# Altium PCB 56PCB -1.pcbdoc
Units mm, origin at the board's own origin, x right, y up, seen from the top; angles counter-clockwise.
Board outline 72.11 x 47.44 mm, 2 copper layers (Top Layer, Bottom Layer); 76 components, 155 nets, 310 pads, 138 vias.
Unrouted connection lines stored in the file: 101.
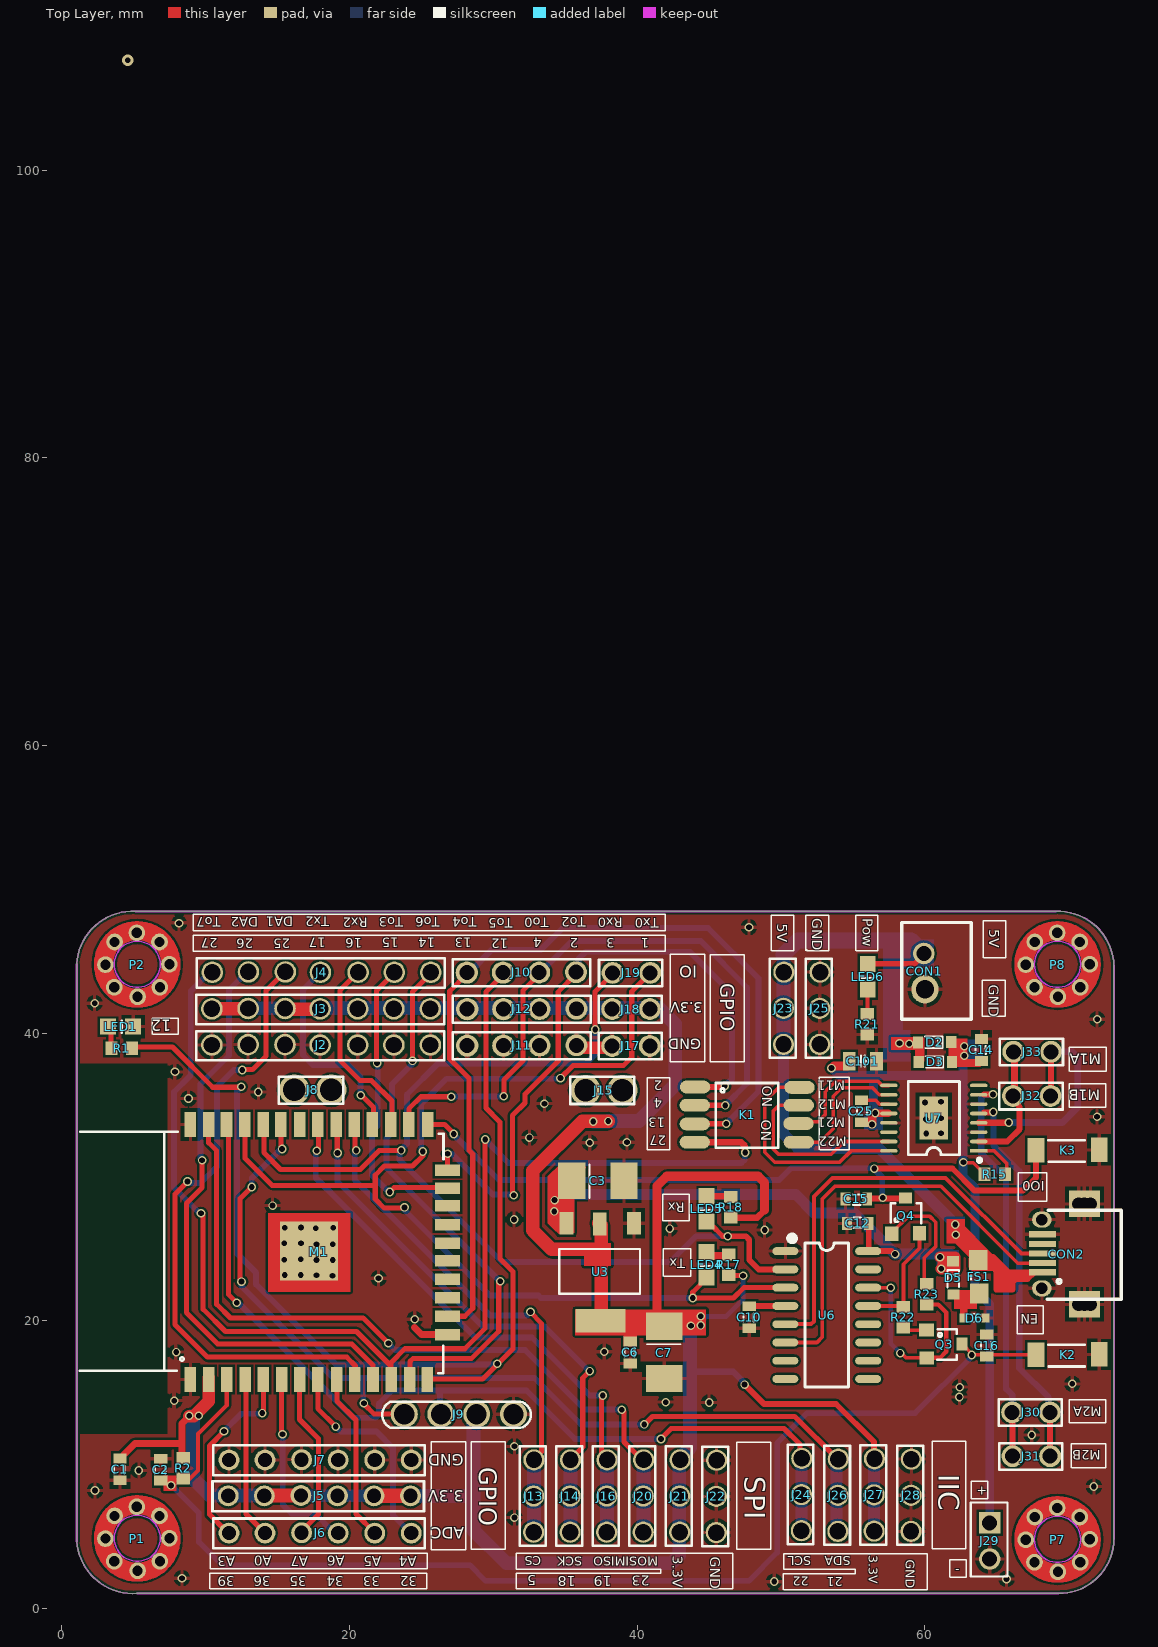
[diagram p0: Top Layer view]
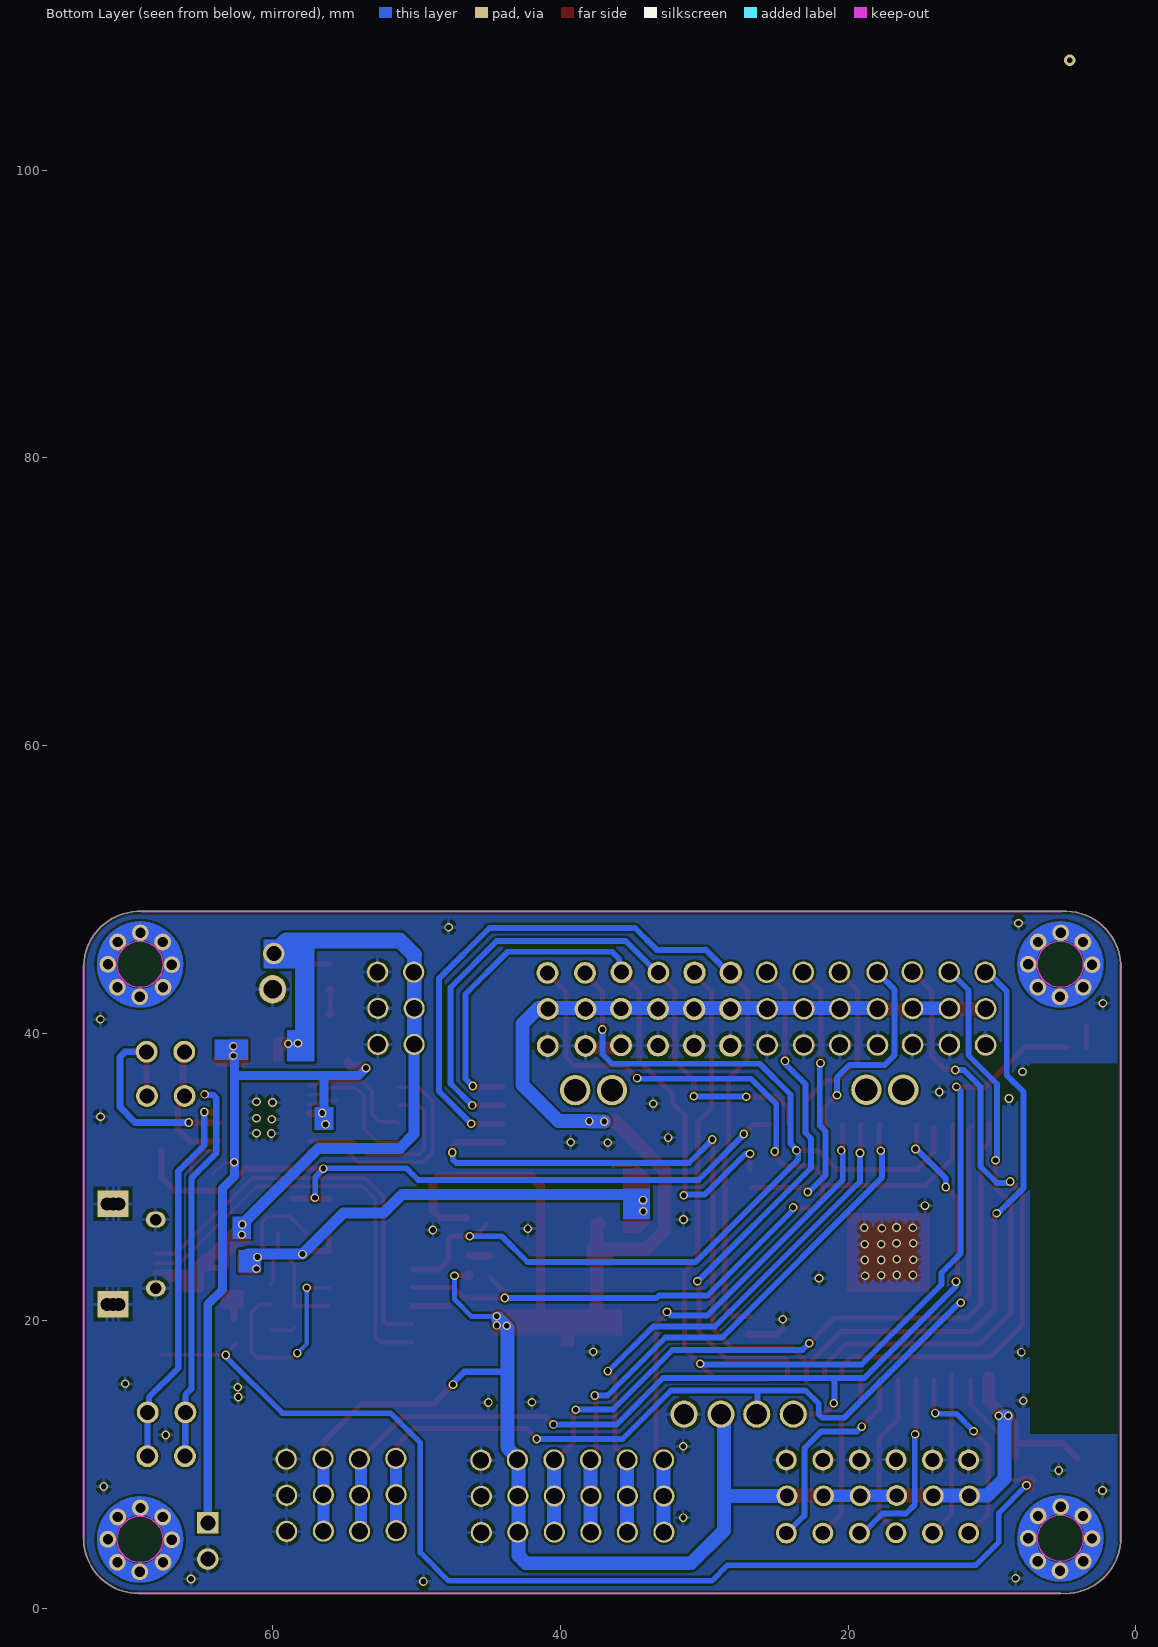
[diagram p1: Bottom Layer view, seen from below]

## Layer stack, top to bottom
Top Solder: solder mask 0.0102, Solder Resist, Dk 3.5
Top Layer: signal copper 0.0356
Dielectric 1: dielectric 0.32, FR-4, Dk 4.8
Bottom Layer: signal copper 0.0356
Bottom Solder: solder mask 0.0102, Solder Resist, Dk 3.5

## Board outline
1.043,4.671 1.043,44.803 cw(c4.915,44.588) 5.129,48.46 69.112,48.46 cw(c69.251,44.561) 73.15,44.701 73.15,4.823 cw(c69.328,4.861) 69.289,1.038 5.231,1.038 cw(c4.953,4.948)

## Design rules (kind name [scope] priority, off if disabled: settings)
Clearance [All] p1: gap=0.152 ignorepadtopadclearanceinfootprint=FALSE
HoleToHoleClearance [All] p1: gap=0.203 allowstackedmicrovias=TRUE
PolygonConnect [All] p1: connectstyle=Relief reliefconductorwidth=0.254 reliefentries=4 polygonreliefangle="90 Angle" airgapwidth=0.254
RoutingVias [All] p1: holewidth=6 width=8 viastyle="Through Hole" minholewidth=0.3 minwidth=0.6 maxholewidth=0.711 maxwidth=1.27
SilkToSilkClearance [All] p1: silktosilkclearance=0.152
SolderMaskExpansion [All] p1: expansion=0.102
Width [All] p1: maxlimit=5 minlimit=0.203 preferedwidth=0.254
28 further rules are at their usual default settings.

## Components (designator, comment, footprint, x,y, rotation, side; value= is the part's Value field where it differs from the comment)
C1 "104" COMPONENT_13 4.04,9.668 r90 top
C2 "104" COMPONENT_13 6.884,9.642 r90 top
C3 "100UF/10V" COMPONENT_17 37.263,29.734 r180 top
C6 "104" COMPONENT_13 39.523,17.796 r90 top
C7 "100UF/10V" COMPONENT_17 41.886,17.796 r90 top
C10 "104" COMPONENT_13 47.801,20.241 r90 top
C12 "104" COMPONENT_13 55.345,26.769 r0 top
C14 "104" COMPONENT_13 63.933,38.827 r90 top
C15 "104" COMPONENT_13 55.243,28.47 r180 top
C16 "104" COMPONENT_13 64.314,18.278 r90 top
C25 "10nf" COMPONENT_13 55.599,34.566 r270 top
C101 "10UF" "C 0805_L" 55.7,38.046 r180 top
CON1 "XH2.54MM*2P直针插座" COMPONENT_24 59.97,44.288 r90 top
CON2 "安卓尾插牛角5针USB插座" COMPONENT_25 69.724,24.628 r90 top
D2 "S4" COMPONENT_21 60.682,39.36 r0 top
D3 "S4" COMPONENT_21 60.732,37.989 r0 top
D5 "S4" COMPONENT_21 61.977,22.977 r90 top
D6 "NC" COMPONENT_22 63.45,20.183 r0 top
FS1 "FS" COMPONENT_23 63.755,23.054 r90 top
J2 "2.54排针13P黑色" COMPONENT_4 18.035,39.183 r90 top
J3 "2.54排针13P红色" COMPONENT_4 18.035,41.697 r90 top
J4 "2.54排针13P黄色" COMPONENT_4 18.06,44.237 r90 top
J5 "2.54排针6P红色" COMPONENT_1 17.908,7.839 r90 top
J6 "2.54排针6P蓝色" COMPONENT_1 17.959,5.248 r90 top
J7 "2.54排针6P黑色" COMPONENT_1 17.959,10.328 r90 top
J8 "2P圆孔排母DS18B20" COMPONENT_5 17.451,36.058 r90 top
J9 "4P圆孔排母DS18B20" COMPONENT_2 27.611,13.503 r90 top
J10 "NC" COMPONENT_6 31.954,44.212 r90 top
J11 "NC" COMPONENT_6 31.98,39.132 r90 top
J12 "NC" COMPONENT_6 31.98,41.672 r90 top
J13 "2.54排针3P白色" COMPONENT_3 32.818,7.814 r90 top
J14 "2.54排针3P绿色" COMPONENT_3 35.358,7.814 r90 top
J15 "2P圆孔排母DS18B20" COMPONENT_5 37.695,36.033 r90 top
J16 "2.54排针3P蓝色" COMPONENT_3 37.898,7.814 r90 top
J17 "NC" COMPONENT_7 39.574,39.106 r90 top
J18 "NC" COMPONENT_7 39.574,41.672 r90 top
J19 "NC" COMPONENT_7 39.6,44.186 r90 top
J20 "2.54排针3P黄色" COMPONENT_3 40.438,7.814 r90 top
J21 "2.54排针3P红色" COMPONENT_3 42.978,7.814 r90 top
J22 "2.54排针3P黑色" COMPONENT_3 45.518,7.788 r90 top
J23 "2.54排针3P红色" COMPONENT_3 50.191,41.723 r90 top
J24 "2.54排针3P蓝色" COMPONENT_3 51.436,7.915 r90 top
J25 "2.54排针3P黑色" COMPONENT_3 52.706,41.723 r90 top
J26 "2.54排针3P黄色" COMPONENT_3 53.976,7.864 r90 top
J27 "2.54排针3P红色" COMPONENT_3 56.491,7.89 r90 top
J28 "2.54排针3P黑色" COMPONENT_3 59.056,7.864 r90 top
J29 "NC" COMPONENT_8 64.517,4.689 r90 top
J30 "2.54排针2P蓝色" COMPONENT_7 67.387,13.63 r90 top
J31 "2.54排针2P黄色" COMPONENT_7 67.413,10.582 r90 top
J32 "2.54排针2P黄色" COMPONENT_7 67.438,35.627 r90 top
J33 "2.54排针2P蓝色" COMPONENT_7 67.463,38.7 r90 top
K1 "贴片拨码开关（4位，1.25mm脚间距）" COMPONENT_18 47.651,34.331 r90 top
K2 "3*4*2MM按键按钮 2脚" COMPONENT_19 69.927,17.643 r90 top
K3 "3*4*2MM按键按钮 2脚" COMPONENT_19 69.927,31.867 r90 top
LED1 "LED蓝" COMPONENT_11 4.09,40.453 r90 top
LED4 "LED蓝" COMPONENT_11 44.832,23.892 r0 top
LED5 "LED蓝" COMPONENT_11 44.832,27.778 r0 top
LED6 "LED蓝" COMPONENT_11 56.032,43.917 r0 top
M1 "ESP32-WROOM-32E（WIFI&蓝牙模块）" COMPONENT_9 18.111,24.781 r90 top
P1 "NC" COMPONENT_26 5.259,4.842 r90 top
P2 "NC" COMPONENT_26 5.259,44.745 r90 top
P7 "NC" COMPONENT_26 69.241,4.766 r90 top
P8 "NC" COMPONENT_26 69.241,44.745 r90 top
Q3 "Y1" COMPONENT_20 61.291,18.38 r90 top
Q4 "Y1" COMPONENT_20 58.672,27.226 r180 top
R1 "510R" COMPONENT_10 4.167,38.929 r90 top
R2 "100K" COMPONENT_10 8.459,9.744 r180 top
R15 "47K" COMPONENT_10 64.87,30.198 r90 top
R17 "510R" COMPONENT_10 46.356,23.892 r180 top
R18 "510R" COMPONENT_10 46.508,27.88 r180 top
R21 "1K" COMPONENT_10 56.005,40.612 r180 top
R22 "10K" COMPONENT_10 58.52,20.241 r180 top
R23 "10K" COMPONENT_10 60.145,21.841 r180 top
U3 "AMS1117-3.3V" COMPONENT_14 37.441,23.384 r90 top
U6 "CH340C" SOP16_N 53.186,20.393 r0 top
U7 "DRV8833" TSSOP16_L 60.628,34.084 r180 top

## Footprints (in the part's own frame and the unit in brackets; to place one, negate y for a bottom-side part, rotate by r counter-clockwise, add the part's x,y. Pads: shape width x height; smd on the part's side, far side on the other; paste and mask are expansions set on the pad)
"C 0805_L" [mil] "无极性贴片电容"
  rect 35x50 smd: 1(-37.4,0) 2(37.4,0)
  silkscreen extent -10,-15 10,15, body extent -39,-24 39,24, height 20
COMPONENT_1 [mil]
  round 57.11 hole 39: 1(-0.5,-249.5) 2(-0.5,-149.5) 3(-0.5,-49.5) 4(0.5,50.5) 5(-0.5,150.5) 6(-0.5,249.5)
  silkscreen extent -43,-286 40,292
COMPONENT_2 [mm]
  round 1.886 hole 1.4: 1(0,3.797) 2(0,1.257) 3(0,-1.232) 4(0,-3.797)
  silkscreen extent -0.94,-5 0.86,5.33
COMPONENT_3 [mil]
  round 58 hole 45: 1(-99,0.5) 2(0,0.5) 3(99,-0.5)
  silkscreen extent -136,-33 136,39
COMPONENT_4 [mil]
  round 59 hole 45: 1(-0.5,299) 2(0.5,200) 3(0.5,99) 4(-0.5,3) 5(-0.5,-100) 6(-0.5,-199) 7(-0.5,-299)
  silkscreen extent -43,-337 38,342
COMPONENT_5 [mil]
  round 83 hole 61: 1(0,50.5) 2(0,-50.5)
  silkscreen extent -38,-84 36,92
COMPONENT_6 [mil]
  round 61 hole 41: 1(-0.25,149.25) 2(-0.25,50.25)
  round 60 hole 41: 3(-0.25,-48.75) 4(0.75,-149.75)
  silkscreen extent -37,-189 37,188
COMPONENT_7 [mil]
  round 60 hole 41: 1(0,51.5) 2(0,-51.5)
  silkscreen extent -37,-84 36,88
COMPONENT_8 [mil]
  rect 59x59 hole 41: 1(49.5,0)
  round 59 hole 41: 2(-49.5,0)
  silkscreen extent -98,-49 106,52
COMPONENT_9 [mil]
  rect 68x31.5 smd: 1(-349,361.13) 2(-349,311.13) 3(-349,261.13) 4(-349,211.13) 5(-349,161.13) 6(-349,111.13) 7(-349,62.13) 8(-349,12.13) 9(-349,-39.87) 10(-349,-88.87) 11(-349,-138.87) 12(-349,-188.87) 13(-349,-238.87) 14(-349,-287.87) 25(349,-288.87) 26(349,-236.87) 27(349,-187.87) 28(349,-136.87) 29(349,-87.87) 30(349,-37.87) 31(349,12.13) 32(349,62.13) 33(349,113.13) 34(349,161.13) 35(349,212.13) 36(349,262.13) 37(349,310.13) 38(349,361.13)
  rect 31.5x68 smd: 15(-226,-342.87) 16(-176,-342.87) 17(-125,-342.87) 18(-74,-342.87) 19(-24,-342.87) 20(24,-342.87) 21(74,-342.87) 22(126,-342.87) 23(174,-342.87) 24(224,-342.87)
  rect 161x159 smd: 39(3,36.13)
  silkscreen extent -332,-332 329,664
COMPONENT_10 [mil]
  rect 37x33 smd: 1(0,28) 2(0,-28)
COMPONENT_11 [mil]
  rect 43x44 smd: 1(0,34.5) 2(0,-34.5)
  silkscreen extent -18,-3 16,-3
COMPONENT_13 [mil]
  rect 27x36 smd: 1(30,0) 2(-30,0)
  silkscreen extent -11,-12 10,16
COMPONENT_14 [mil]
  rect 62x38 smd: 1(133.75,-92.5) 2(131.75,1.5) 3(133.75,92.5)
  rect 63x138 smd: 4(-133.25,-0.5)
  silkscreen extent -59,-108 63,112
COMPONENT_17 [mil]
  rect 74.84x101 smd: 1(71.25,0)
  rect 73.84x101 smd: 2(-71.75,0)
  silkscreen extent 22,-45 22,48
COMPONENT_18 [mil]
  oval 34.84x83 smd: 1(75.5,142.5) 2(25.5,143.5) 3(-25.5,143.5) 4(-75.5,143.5) 5(-75.5,-141.5) 6(-24.5,-140.5) 7(25.5,-141.5) 8(74.5,-143.5)
  silkscreen extent -91,-86 87,86
COMPONENT_19 [mil]
  rect 66.84x46 smd: 1(-0.5,86.5) 2(0.5,-86.5)
  silkscreen extent -32,-48 27,52
COMPONENT_20 [mil]
  rect 35.84x40 smd: 1(38,46) 2(-38,45)
  rect 35.84x30 smd: 3(0,-51)
  silkscreen extent -43,-37 41,17
COMPONENT_21 [mil]
  rect 27.84x33 smd: 1(-45.5,-0.5) 2(45.5,0.5)
  silkscreen extent -26,-16 22,16
COMPONENT_22 [mil]
  rect 23.84x24 smd: 1(-29,0) 2(29,0)
  silkscreen extent -9,-9 10,11
COMPONENT_23 [mil]
  rect 54.84x51 smd: 3(46,1) 4(-46,-1)
  silkscreen extent -8,-19 5,21
COMPONENT_24 [mil]
  round 59 hole 41: 1(49,1.5)
  oval 77.84x74 hole 50: 2(-49,-1.5)
  silkscreen extent -131,-128 134,62
COMPONENT_25 [mil]
  rect 16.84x74 smd: 1(-49.5,60.25) 2(-24.5,60.25) 3(1.5,60.25) 4(27.5,60.25) 5(54.5,60.25)
  oval 43.84x54 hole 32: 6(-93.5,62.25) 7(94.5,62.25)
  rect 72.84x53 hole 36: 8(137.5,-38.75) 9(137.5,-70.75) 10(137.5,-53.75) 11(-137.5,-38.75) 12(-137.5,-70.75) 13(-137.5,-54.75)
  silkscreen extent -124,-155 121,47
COMPONENT_26 [mil]
  round 45.84 hole 28: 1(-61.5,63.5) 2(0.5,87.5) 3(62.5,62.5) 4(87.5,1.5) 5(62.5,-60.5) 6(1.5,-87.5) 7(-61.5,-61.5) 8(-87.5,-0.5)
  Top Layer circle w51.94: c1.08,0.5 r92.42
  Bottom Layer circle w51.94: c1.08,0.5 r92.42
  Keep-Out Layer circle w3.94: c1.37,0.5 r63.13
SOP16_N [mm] "10.3*6.2*1.8mm（长宽高）"
  oval 1.8x0.55 smd: 1(-2.877,4.445) 2(-2.877,3.175) 3(-2.877,1.905) 4(-2.877,0.635) 5(-2.877,-0.635) 6(-2.877,-1.905) 7(-2.877,-3.175) 8(-2.877,-4.445) 9(2.877,-4.445) 10(2.877,-3.175) 11(2.877,-1.905) 12(2.877,-0.635) 13(2.877,0.635) 14(2.877,1.905) 15(2.877,3.175) 16(2.877,4.445)
  silkscreen extent -2.57,-5 1.52,5.49, body extent -3,-5 3,5, height 1.9
TSSOP16_L [mm] "5*6.4*1mm（长宽高）"
  rect 2x3 smd: 0(0,0)
  rect 1.2x0.25 smd: 1(-3.125,2.275)
  oval 1.2x0.25 smd: 2(-3.125,1.625) 3(-3.125,0.975) 4(-3.125,0.325) 5(-3.125,-0.325) 6(-3.125,-0.975) 7(-3.125,-1.625) 8(-3.125,-2.275) 9(3.125,-2.275) 10(3.125,-1.625) 11(3.125,-0.975) 12(3.125,-0.325) 13(3.125,0.325) 14(3.125,0.975) 15(3.125,1.625) 16(3.125,2.275)
  silkscreen extent -3.3,-2.54 1.78,3.05, body extent -3.2,-2.5 3.2,2.5, height 1.03

## Via types
v1: diameter 0.6, hole 0.4, Top Layer to Bottom Layer, tented both sides, 137 vias
v2: diameter 0.8, hole 0.4, Top Layer to Bottom Layer, 1 vias

## Nets (pads, with @x,y where several pads share a name; then routed paths per layer and width w, separated by ;. In a path a pad name is that pad's centre, name@x,y a point inside that pad or via, vN(x,y) a via of type N, cw(c..) or ccw(c..) an arc to the next point about the centre after c; other vN are vias at no path point)
3.3V: C1.1 C6.1 C7.1 J3.1 J3.2 J3.3 J3.4 J3.5 J3.6 J3.7 J5.1 J5.2 J5.3 J5.4 J5.5 J5.6 J9.3 J12.1 J12.2 J12.3 J12.4 J18.1 J18.2 J21.1 J21.2 J21.3 J27.1 J27.2 J27.3 M1.2 R2.2 R17.1 R18.1 U3.2 U3.4 | length 193
  Top Layer w0.345: R17.1@46.4,23.136 v1(47.369,23.136)
  Top Layer w0.405: 52.932,14.214 53.83,14.214 56.465,11.579 56.465,10.379 J27.3@56.516,10.328
  Top Layer w0.43: v1(47.474,15.561) 48.82,14.214 52.932,14.214
  Top Layer w0.456: R18.1 R18.1@46.661,27.168 ; R18.1@46.661,27.092 R18.1@46.661,27.168 ; 48.868,27.686 48.35,27.168 R18.1@46.661,27.168
  Top Layer w0.481: C1.1 5.081,11.471 8.281,11.471 ; R2.2@8.358,10.531 8.358,12.843 v1@8.866,13.351
  Top Layer w0.633: C7.1 41.375,20.116 41.375,29.359 42.061,30.045 48.42,30.045 48.868,29.597 48.868,27.686
  Top Layer w0.71: v1@44.324,20.336 v1@44.375,20.336 ; v1(44.426,20.31) v1@44.452,20.337 ; R17.1 R17.1@46.4,23.136
  Top Layer w0.862: v1@8.866,13.351 9.17,13.351 10.212,14.392 M1.2@10.212,16.043
  Top Layer w0.938: J3.1@10.415,41.697 J3.2@13.158,41.697 ; J3.3@15.673,41.672 J3.4@18.06,41.672 ; v1(36.955,33.855) 36.178,33.856 32.742,30.42 32.742,26.279 34.062,24.959 37.491,24.959 ; v1(36.955,33.855) 37.971,33.855 v1(37.997,33.881) ; U3.2@37.339,26.787 37.491,26.635 37.491,24.959 ; U3.4@37.491,20.183 37.491,24.959 ; 37.568,24.959 37.491,24.959
  Top Layer w0.989: J5.5@14.111,7.852 J5.4 ; J5.2 J5.1
  Bottom Layer w0.345: v1(44.426,20.31) 46.194,20.31 47.369,21.485 v1(47.369,23.136)
  Bottom Layer w0.43: 43.918,16.45 46.686,16.45 47.474,15.662 v1(47.474,15.561) v1@47.474,15.484
  Bottom Layer w0.837: J27.1 J27.2 J27.3@56.478,10.544
  Bottom Layer w0.862: J5.4@16.651,7.826 J5.3 J5.2
  Bottom Layer w0.964: v1@9.247,13.351 8.993,13.351 9.12,13.224 9.12,9.033 10.313,7.839 J5.5@14.2,7.839 ; J3.2@12.853,41.723 J3.3@15.52,41.723 ; J3.4@18.06,41.748 41.53,41.748 42.648,40.63 42.648,36.398 40.13,33.881 v1(37.997,33.881) 37.971,33.855 v1(36.955,33.855) ; J5.1 28.589,7.826 ; J9.3 28.627,13.287 28.627,5.426 30.913,3.14 42.394,3.14 42.927,3.673 42.927,10.404 43.689,11.166 43.689,19.498 v1@44.349,20.158
  other v1: 8.866,13.402 9.526,13.402 43.74,19.65 44.426,19.675
+5v: C3.1 C12.1 D5.2 U3.3 U6.16 | length 43.5
  Top Layer w0.202: U3.3@35.155,26.279 34.418,26.279 33.859,26.838 33.859,29.988 34.672,30.801 36.221,30.801 C3.1@36.348,30.674
  Top Layer w0.405: C12.1 56.107,24.882 U6.16 57.68,24.838 57.883,24.635 v1(57.936,24.635)
  Top Layer w0.786: v1(61.063,24.425) 62.104,24.425 62.104,23.612 v1(61.139,23.612) ; 61.266,23.993 61.748,23.993 D5.2@61.825,23.917
  Bottom Layer w0.76: 34.977,28.769 51.03,28.769 52.3,27.499 55.072,27.499 v1(57.936,24.635) 60.853,24.635 v1(61.063,24.425) ; v1@61.063,24.654 61.774,24.654
  other v1: 34.24,27.6 34.266,28.388
AOUT1: J32.1 J33.1 U7.2 | length 8.9
  Top Layer w0.405: U7.2 65.734,32.459 66.597,33.322 66.597,34.857 66.13,35.324 J32.1
  Top Layer w0.481: J32.1@66.143,35.55 66.244,35.652 66.244,38.611 J33.1
AOUT2: J32.2 J33.2 U7.4 | length 15.9
  Top Layer w0.43: U7.4 63.763,33.769 65.825,33.769 v1(65.835,33.779) ; J32.2@68.746,35.817 68.772,35.843 J33.2
  Bottom Layer w0.481: v1(65.835,33.779) 69.569,33.779 70.636,34.846 70.636,38.349 70.284,38.7 J33.2 ; J33.2@68.683,38.573 J33.2@68.683,38.7
BOUT1: J30.1 J31.1 U7.7 | length 30.4
  Top Layer w0.43: U7.7@64.138,35.722 64.73,35.722 v1(64.743,35.735) ; J30.1 66.092,13.618 66.092,10.595 J31.1
  Bottom Layer w0.43: v1(64.743,35.735) 64.71,35.702 64.15,35.702 63.93,35.483 63.93,31.645 65.657,29.918 65.657,15.262 66.079,14.841 J30.1 66.092,13.618 66.092,10.595 J31.1
BOUT2: J30.2 J31.2 U7.5 | length 29.3
  Top Layer w0.43: U7.5@64.138,34.483 64.736,34.483 v1(64.768,34.516) ; J30.2 68.708,13.618 68.708,10.595 J31.2
  Bottom Layer w0.43: v1(64.768,34.516) 64.768,32.204 66.572,30.401 66.572,16.71 68.609,14.673 68.609,13.717 68.708,13.618 68.708,10.595 J31.2
D+: CON2.3 U6.5 | length 29.4
  Top Layer w0.278: U6.5 52.094,19.758 52.297,19.961 52.297,28.651 53.582,29.937 61.448,29.937 66.718,24.667 CON2.3
D-: CON2.2 U6.6 | length 30.2
  Top Layer w0.254: U6.6 52.5,18.488 52.881,18.869 52.881,28.47 53.758,29.348 61.123,29.348 66.464,24.006 CON2.2
DTR: Q4.2 R22.2 U6.13 | length 8
  Top Layer w0.252: U6.13 R22.2@58.444,21.028 ; R22.2 58.52,23.924 59.637,25.041 Q4.2
GND: C1.2 C2.1 C3.2 C6.2 C7.2 C10.2 C12.2 C14.1 C15.1 C16.1 C101.1 CON1.2 CON2.5 CON2.6 CON2.7 CON2.8 CON2.9 CON2.10 CON2.11 CON2.12 CON2.13 D6.2 J2.1 J2.2 J2.3 J2.4 J2.5 J2.6 J2.7 J7.1 J7.2 J7.3 J7.4 J7.5 J7.6 J9.4 J11.1 J11.2 J11.3 J11.4 J17.1 J17.2 J22.1 J22.2 J22.3 J25.1 J25.2 J25.3 J28.1 J28.2 J28.3 J29.2 K2.2 K3.2 LED1.2 M1.1 M1.15 M1.38 M1.39 R21.1 U3.1 U6.1 U7.0 U7.3 U7.6 U7.13 | length 5.1
  Top Layer w0.481: 24.537,19.523 25.02,19.04 M1.15@26.95,19.04
  Top Layer w0.837: J11.4@35.84,38.979 J17.1@38.279,38.979
  other v1: 49.531,1.87 65.685,2.048 8.358,2.099 31.472,6.315 2.312,8.195 71.756,8.474 5.36,9.592 31.472,11.268 67.438,12.055 45.01,14.316 41.987,14.341 7.824,14.443 62.409,14.697 62.434,15.383 70.257,15.611 7.951,17.821 37.72,17.847 24.537,20.107 22.023,22.952 18.822,23.13 17.705,23.155 15.495,23.181 16.613,23.181 17.705,24.222 18.848,24.222 15.47,24.247 16.613,24.273 17.705,25.314 18.848,25.314 15.47,25.39 16.638,25.39 48.868,26.311 42.267,26.406 17.654,26.432 15.495,26.457 18.873,26.457 16.638,26.483 31.446,27.041 14.657,28.007 36.704,32.375 39.292,32.407 32.513,32.731 60.095,33.017 61.136,33.042 60.069,34.008 61.136,34.084 71.982,34.185 33.554,35.093 60.018,35.176 61.136,35.227 8.815,35.449 13.666,35.906 7.875,37.303 71.985,40.961 2.287,42.078 47.778,47.361 8.154,47.641
M11: K1.8 U7.16 | length 15.6
  Top Layer w0.254: K1.8 49.839,36.224 48.868,35.252 48.868,31.722 49.579,31.01 54.075,31.01 54.873,31.809 U7.16
M12: K1.7 U7.15 | length 13.1
  Top Layer w0.254: K1.7 49.865,34.979 49.477,34.592 49.477,31.925 49.833,31.569 53.491,31.569 54.38,32.459 U7.15
M21: K1.6 U7.9 | length 8.6
  Top Layer w0.254: K1.6 51.341,33.83 52.576,33.83 53.084,34.338 53.084,35.938 53.795,36.649 56.742,36.649 57.032,36.359 U7.9
M22: K1.5 U7.10 | length 9.3
  Top Layer w0.254: K1.5 52.709,32.414 53.643,33.347 53.643,35.608 54.227,36.192 56.361,36.192 56.844,35.709 U7.10
Net: 
NewNet1: P8.1 P8.2 P8.3 P8.4 P8.5 P8.6 P8.7 P8.8
NewNet2: P7.1 P7.2 P7.3 P7.4 P7.5 P7.6 P7.7 P7.8
NewNet3: P2.1 P2.2 P2.3 P2.4 P2.5 P2.6 P2.7 P2.8
NewNet4: P1.1 P1.2 P1.3 P1.4 P1.5 P1.6 P1.7 P1.8
NewNet15: J10.4 K1.1 M1.24 | length 45.8
  Top Layer w0.354: M1.24 v1@26.82,31.61 ; v1(31.421,28.718) 31.345,28.794 31.345,34.28 32.208,35.144 32.208,35.754 34.52,38.065 34.52,42.866 J10.4@35.79,44.136
  Top Layer w0.405: K1.1 45.976,36.249 46.046,36.319 v1(46.099,36.319)
  Bottom Layer w0.405: v1(26.823,31.613) 27.128,31.613 29.973,28.769 31.37,28.769 v1(31.421,28.718) ; J10.4@35.917,44.364 35.917,45.152 36.425,45.66 43.664,45.66 46.607,42.716 46.607,36.827 v1(46.099,36.319)
NewNet16: J10.3 K1.2 M1.26 | length 45.4
  Top Layer w0.354: M1.26 24.128,34.734 24.969,35.576 v1(27.077,35.576) ; v1(30.735,35.601) 30.735,36.744 32.056,38.065 32.056,42.942 33.326,44.212 J10.3@33.326,44.288
  Top Layer w0.405: K1.2 44.01,34.976 46.122,34.976 v1(46.125,34.973)
  Bottom Layer w0.405: v1@27.103,35.601 v1(30.735,35.601) ; J10.3@33.199,44.364 33.427,44.364 35.459,46.396 44.426,46.396 47.649,43.173 47.649,36.497 v1(46.125,34.973)
NewNet17: J10.2 M1.14 R1.2 | length 76.5
  Top Layer w0.354: R1.2@4.802,38.979 4.852,39.03 7.697,39.03 10.491,36.236 v1@12.599,36.236 ; M1.14@25.503,15.942 29.262,15.942 31.37,18.05 31.37,23.409 30.456,24.324 30.456,33.823 29.49,34.788 29.49,42.866 J10.2@30.811,44.186
  Bottom Layer w0.405: v1(12.472,36.262) 12.193,35.982 12.193,24.654 13.514,23.333 13.514,22.52 19.076,16.958 v1@30.176,16.958
  other v1: 30.278,17.008
NewNet18: J10.1 K1.3 M1.16 | length 62.6
  Top Layer w0.354: M1.16 28.017,20.31 28.576,20.869 28.576,31.588 28.322,31.842 28.322,36.846 26.976,38.192 26.976,42.916 J10.1@28.163,44.104
  Top Layer w0.405: K1.3 44.016,33.693 46.191,33.693 v1(46.201,33.703)
  Bottom Layer w0.405: 29.897,45.787 33.3,45.787 34.824,47.311 44.934,47.311 48.436,43.808 48.436,35.938 v1(46.201,33.703)
  Bottom Layer w0.43: J10.1 28.316,44.206 29.897,45.787
NewNet19: J4.7 M1.13 | length 37.6
  Top Layer w0.354: M1.13@24.207,16.094 24.207,17.161 24.41,17.364 28.474,17.364 30.379,19.269 30.379,22.647 v1(30.481,22.749) ; v1(24.385,38.065) 24.385,42.866 J4.7@25.655,44.136
  Bottom Layer w0.405: v1(24.385,38.065) 24.385,37.862 22.963,36.439 22.963,33.061 22.582,32.68 22.582,30.623 v1@30.456,22.749
NewNet20: J4.6 M1.23 | length 20.6
  Top Layer w0.354: v1(21.921,37.913) 21.896,37.938 21.896,42.967 23.039,44.11 J4.6@23.14,44.11 ; v1(22.81,28.946) 23.115,29.251 M1.23@26.747,29.251
  Bottom Layer w0.405: v1(21.921,37.913) 21.972,37.862 21.972,33.569 21.566,33.163 21.566,30.115 22.734,28.946 v1(22.81,28.946)
NewNet21: J4.5 M1.27 | length 13.1
  Top Layer w0.354: J4.5@20.575,44.212 19.33,42.967 19.33,38.116 20.753,36.693 21.54,36.693 22.963,35.271 22.963,33.725 M1.27
NewNet22: J4.4 M1.28 | length 14.9
  Top Layer w0.354: v1@20.778,35.728 21.667,34.839 21.667,33.696 M1.28@21.489,33.518
  Bottom Layer w0.405: J4.4@18.06,44.313 16.765,43.018 16.765,38.471 17.451,37.786 19.915,37.786 20.778,36.922 v1(20.778,35.677)
NewNet23: J4.3 M1.10 | length 43.8
  Top Layer w0.354: v1@8.739,29.658 7.875,28.794 7.875,19.726 10.136,17.466 19.813,17.466 20.423,16.856 M1.10@20.423,16.069 ; v1@12.472,37.455 13.26,37.455 14.2,38.395 14.2,42.942 J4.3@15.597,44.339
  Bottom Layer w0.405: v1(8.739,29.683) 8.84,29.581 9.653,29.581 10.796,30.724 10.796,36.262 11.964,37.43 v1(12.549,37.43)
NewNet24: J4.2 M1.11 | length 41.1
  Top Layer w0.354: v1(9.755,31.156) 9.755,29.251 8.662,28.159 8.662,20.564 10.847,18.38 20.169,18.38 21.642,16.907 M1.11@21.642,15.992
  Bottom Layer w0.405: v1(9.755,31.156) 9.653,31.258 9.653,36.465 11.634,38.446 11.634,42.993 J4.2@12.98,44.339
NewNet25: J4.1 K1.4 M1.12 | length 85.4
  Top Layer w0.354: v1(9.678,27.473) 9.831,27.321 9.831,20.793 11.38,19.244 20.499,19.244 22.886,16.856 ; M1.12@22.886,15.764 22.886,17.085 23.852,18.05 28.017,18.05 29.414,19.447 v1@29.414,32.604
  Top Layer w0.456: K1.4 47.226,32.414 47.494,32.145 47.494,31.724 v1(47.522,31.696)
  Bottom Layer w0.405: v1(9.678,27.473) 9.577,27.473 7.799,29.251 7.799,35.906 8.967,37.074 8.967,42.916 J4.1@10.275,44.225 ; v1@29.44,32.579 31.059,30.96 47.247,30.96 47.484,31.197 47.484,31.659 v1(47.522,31.696)
  other v1: 29.44,32.604
NewNet26: J9.1 J26.1 J26.2 J26.3 M1.33 | length 69.6
  Top Layer w0.354: v1(12.498,22.723) 12.396,22.825 12.396,28.489 v1(13.209,29.302) ; v1@15.238,32.023 M1.33 ; v1@21.007,14.214 21.718,13.503 J9.1 ; v1(40.489,12.792) 40.514,12.792 41.073,13.351 50.953,13.351 J26.3@53.925,10.379
  Bottom Layer w0.405: v1(12.498,22.723) 12.498,22.393 18.873,16.018 32.869,16.018 36.094,12.792 40.387,12.792 v1@40.489,12.69 ; v1(13.209,29.302) 13.209,29.912 ; 13.476,30.178 13.209,29.912 ; v1@15.292,32.02 15.292,31.994 13.209,29.912 ; 20.956,15.992 20.956,14.316 v1(21.007,14.265)
  Bottom Layer w0.837: J26.1@53.874,5.324 J26.3@53.874,10.265
  other v1: 15.317,31.944
NewNet27: J9.2 J24.1 J24.2 J24.3 M1.36 | length 67.2
  Top Layer w0.354: M1.36@11.406,33.544 11.583,33.366 11.583,21.834 v1(12.168,21.25) ; v1@41.708,11.852 42.368,12.513 50.217,12.513 51.334,11.395 J24.3@51.334,10.404
  Bottom Layer w0.405: v1(12.168,21.25) 12.269,21.25 20.27,13.249 21.82,13.249 22.048,13.478 22.048,14.24 22.963,15.154 28.22,15.154 ; J9.2@26.29,13.402 26.29,15.002 ; 27.001,15.154 32.31,15.154 35.688,11.776 v1(41.657,11.776)
  Bottom Layer w0.837: J24.1 J24.3@51.423,10.404
NewNet28: J20.1 J20.2 J20.3 M1.37 | length 53.2
  Top Layer w0.354: M1.37@10.212,33.747 10.212,32.375 10.771,31.817 10.771,21.149 11.736,20.183 20.956,20.183 v1(22.709,18.431) ; v1@38.888,13.884 39.092,13.681 39.092,11.573 40.336,10.328 J20.3
  Bottom Layer w0.405: v1(22.709,18.431) 23.166,17.974 32.208,17.974 36.348,13.833 v1@38.863,13.833
  Bottom Layer w0.964: J20.1@40.451,5.324 J20.3
  other v1: 38.939,13.808
NewNet29: J16.1 J16.2 J16.3 M1.31 | length 39.5
  Top Layer w0.354: v1(17.73,31.817) 17.857,31.944 17.857,33.591 M1.31 ; v1@37.517,14.697 37.517,10.735 J16.3@37.847,10.404
  Bottom Layer w0.405: v1@17.654,31.842 17.654,29.937 28.754,18.837 32.691,18.837 36.729,14.799 v1(37.618,14.799)
  Bottom Layer w0.964: J16.1@37.911,5.324 J16.3
NewNet30: J14.1 J14.2 J14.3 M1.30 | length 38.6
  Top Layer w0.329: J14.3 J14.3@35.371,10.366
  Top Layer w0.354: M1.30 19.153,33.566 v1@19.153,31.69 ; J14.3@35.371,10.366 36.221,11.217 36.221,16.018 v1(36.704,16.5)
  Bottom Layer w0.405: v1(19.178,31.664) 19.178,29.683 29.262,19.599 33.554,19.599 v1@36.653,16.5
  Bottom Layer w0.964: J14.1@35.371,5.337 J14.3
NewNet31: J13.1 J13.2 J13.3 M1.29 | length 36
  Top Layer w0.329: v1@32.589,20.59 33.351,19.828 33.351,10.849 J13.3
  Top Layer w0.354: M1.29 20.397,33.591 20.397,31.918 v1(20.473,31.842)
  Bottom Layer w0.405: v1(20.473,31.842) 20.372,31.74 20.372,29.785 29.795,20.361 32.335,20.361 v1(32.589,20.615)
  Bottom Layer w0.964: J13.1@32.831,5.324 J13.3
NewNet32: J6.6 M1.5 | length 13.4
  Top Layer w0.354: v1(11.279,12.309) 10.263,11.293 10.263,6.544 J6.6@11.456,5.35 ; v1(13.946,13.579) 14.019,13.652 M1.5
  Bottom Layer w0.405: v1(11.279,12.309) 11.279,12.335 12.472,13.529 13.895,13.529 v1(13.946,13.579)
NewNet33: J6.5 M1.4 | length 11.6
  Top Layer w0.354: M1.4@12.803,16.246 12.803,6.569 J6.5
NewNet34: J6.4 M1.7 | length 11.5
  Top Layer w0.354: M1.7 16.533,13.125 17.857,11.801 17.857,6.544 J6.4@16.74,5.426
NewNet35: J6.3 M1.6 | length 13.3
  Top Layer w0.354: v1@15.289,12.16 M1.6
  Bottom Layer w0.405: v1@15.368,12.182 15.368,7.208 15.981,6.594 17.603,6.594 18.848,5.35 J6.3@19.127,5.35
  other v1: 15.343,12.106
NewNet36: J6.2 M1.9 | length 11.8
  Top Layer w0.354: M1.9 19.124,14.421 20.448,13.097 20.448,6.569 21.756,5.261 J6.2
NewNet37: J6.1 M1.8 | length 14.8
  Top Layer w0.354: M1.8 17.803,13.887 v1(19.051,12.64)
  Bottom Layer w0.405: v1(19.051,12.64) 19.381,12.309 21.87,12.309 23.036,11.144 23.036,6.47 24.271,5.236 J6.1
NewNet38: 
NewNet39: 
NewNet40: 
NewNet41: 
NewNet42: 
NewNet43: 
NewNet44: 
NewNet45: 
NewNet46: 
NewNet47: 
NewNet48: 
NewNet49: 
NewNet50: 
NewNet51: 
NewNet52: 
NewNet53: 
NewNet54: 
NewNet55: 
NewNet56: 
NewNet57: 
NewNet58: 
NewNet59: 
NewNet60: 
NewNet61: 
NewNet62: 
NewNet63: 
NewNet64: 
NewNet65: 
NewNet66: 
NewNet67: 
NewNet68: 
NewNet69: 
NewNet70: 
NewNet71: 
NewNet72: 
NewNet73: 
NewNet74: 
NewNet75: 
NewNet76: 
NewNet77: 
NewNet78: 
NewNet79: 
NewNet80: 
NewNet81: 
NewNet82: 
NewNet83: 
NewNet84: 
NewNet85: 
NewNet86: 
NewNet87: 
NewNet88: 
NewNet89: 
NewNet90: 
NewNet91: 
NewNet92: 
NewNet93: 
NewNet94: 
NewNet95: 
NewNet96: 
NewNet97: 
NewNet100: D5.1 D6.1 FS1.4 | length 2.4
  Top Layer w0.532: D6.1 62.714,21.225 63.298,21.809 FS1.4@63.857,21.809
NewNet102: C15.2 K3.1 M1.25 Q4.3 | length 52.1
  Top Layer w0.354: M1.25 26.62,33.645 27.255,33.01 v1(27.255,32.985)
  Top Layer w0.405: C15.2 56.031,28.496 58.647,28.496 Q4.3 ; v1(56.488,30.579) 61.923,30.579 63.447,29.055 66.826,29.055 67.73,29.959 K3.1
  Bottom Layer w0.405: v1(27.255,32.985) 27.255,32.934 30.405,29.785 49.887,29.785 50.706,30.604 56.462,30.604 v1(56.488,30.579) 56.488,30.526 57.047,29.967 57.047,28.572 v1(57.072,28.547)
NewNet104: Q4.1 R23.2 | length 8.5
  Top Layer w0.254: Q4.1 57.707,26.11 58.873,27.277 60.323,27.277 60.755,26.845 60.755,25.158 59.968,24.371 59.968,22.73 R23.2
NewNet105: C2.2 C16.2 K2.1 M1.3 Q3.3 R2.1 | length 86
  Top Layer w0.252: Q3.3 63.336,17.631 K2.1
  Top Layer w0.303: C2.2@7.011,8.931 8.815,8.931 9.475,9.592 9.475,12.132 11.479,14.135 M1.3
  Bottom Layer w0.379: v1@7.519,8.55 7.621,8.55 9.526,6.645 9.526,4.613 11.126,3.013 28.373,3.013 29.465,1.921 47.778,1.921 49.734,3.877 49.734,11.497 51.817,13.579 59.335,13.579 v1@63.272,17.516
  other v1: 7.596,8.55 63.272,17.618
NewNet107: Q3.1 R22.1 | length 1.8
  Top Layer w0.252: R22.1@58.444,19.58 58.679,19.345 Q3.1
NewNet112: 
NewNet113: 
NewNet115: LED6.2 R21.2 | length 1.7
  Top Layer w0.305: R21.2@56.018,41.336 LED6.2@56.018,42.974
  Top Layer w0.608: R21.2 R21.2@56.018,41.336 ; LED6.2@56.018,42.974 LED6.2@56.031,42.987
NewNet116: LED5.1 R18.2 | length 1.8
  Top Layer w0.456: LED5.1 R18.2@46.648,28.654
NewNet117: LED4.1 R17.2 | length 1.5
  Top Layer w0.506: LED4.1@44.908,24.527 46.28,24.527 R17.2
NewNet118: LED1.1 R1.1 | length 1.5
  Top Layer w0.354: R1.1@3.43,39.005 LED1.1@3.43,40.478
NewNet119: 
NewNet120: 
NewNet121: 
NewNet122: 
NewNet123: 
NewNet124: 
NewNet125: 
NewNet126: 
NewNet127: 
NewNet128: 
NewNet129: 
NewNet130: 
NewNet131: 
NewNet132: 
NewNet133: 
NewNet134: 
NewNet135: 
NewNet136: 
NewNet137: 
NewNet138: 
NewNet139: 
NewNet140: 
NewNet141: 
NewNet142: 
NewNet143: 
NewNet144: 
NewNet145: 
NewNet146: 
NewNet147: 
NewNet148: 
NewNet149: 
NewNet150: 
NewNet151: 
R1: C25.2 U7.11 | length 2
  Top Layer w0.254: C25.2 56.589,35.328 56.859,35.059 U7.11
R2: R15.2 U7.1 | length 3.3
  Top Layer w0.254: U7.1 64.833,31.809 65.708,30.934 R15.2@65.708,29.994
RTS: Q3.2 R23.1 U6.14 | length 14.2
  Top Layer w0.252: U6.14 v1(57.631,22.298) ; v1(58.291,17.752) 58.385,17.752 58.722,17.415 Q3.2
  Top Layer w0.303: R23.1 60.933,21.13 61.492,20.571 61.492,17.853 61.053,17.415 Q3.2
  Bottom Layer w0.303: v1(57.631,22.298) 57.631,18.412 v1(58.291,17.752)
RXD: J19.2 LED4.2 M1.35 U6.3 | length 77.3
  Top Layer w0.354: M1.35 12.752,33.617 12.752,31.283 14.631,29.404 21.794,29.404 ; v1@23.775,27.829 22.429,27.829 21.794,28.464 21.794,30.115 22.429,30.75 24.385,30.75 25.096,31.461 v1(25.096,31.766) ; v1(34.672,36.871) 35.536,37.735 39.041,37.735 39.625,38.319 39.625,42.891 40.946,44.212 J19.2@40.997,44.212 ; LED4.2 44.832,22.952 43.867,21.987 v1(43.867,21.58) 46.702,21.58 47.42,22.298 U6.3
  Bottom Layer w0.405: v1(23.826,27.88) 23.826,27.702 29.77,21.758 33.145,21.758 33.323,21.58 v1(43.867,21.58) ; v1(25.096,31.766) 24.995,31.867 24.995,35.068 26.747,36.82 v1@34.596,36.82
TXD: J19.1 LED5.2 M1.34 U6.2 | length 71.5
  Top Layer w0.354: M1.34@14.047,33.468 14.047,31.69 15.216,30.521 20.753,30.521 22.074,31.842 v1(23.598,31.842) ; v1@37.136,40.173 37.085,40.224 37.085,42.891 J19.1@38.38,44.186 ; LED5.2@45.137,26.686 45.95,25.873 v1(46.305,25.873)
  Top Layer w0.405: v1(46.305,25.873) 47.564,25.873 47.801,25.636 47.801,24.229 48.461,23.568 U6.2
  Bottom Layer w0.405: v1(37.085,40.249) 37.085,38.522 36.425,37.862 26.138,37.862 24.004,35.728 24.004,32.299 23.471,31.766 23.471,31.207 30.601,24.076 42.293,24.076 44.09,25.873 v1(46.305,25.873)
V3: C10.1 U6.4 | length 2.5
  Top Layer w0.405: C10.1 47.814,21.016 50.296,21.016 U6.4
VBUS: 
VIN: CON1.1 CON2.1 D2.1 D3.1 FS1.3 J23.1 J23.2 J23.3 LED6.1 | length 60.4
  Top Layer w0.379: LED6.1@56.005,44.815 59.279,44.815 CON1.1@59.92,45.456
  Top Layer w0.405: FS1.3@63.399,24.451 63.247,24.298 63.247,23.765 63.349,23.663 64.771,23.663 64.974,23.46 64.974,22.165 66.092,22.165 66.117,22.19 66.117,22.698 66.32,22.901 67.133,22.901 CON2.1@67.603,23.371 ; FS1.3@63.55,24.451 64.368,24.451 64.746,24.451 65.825,23.371 CON2.1@67.603,23.371 ; CON2.1 CON2.1@67.603,23.371
  Top Layer w0.76: v1(62.127,26.692) 64.368,24.451 64.705,24.114 ; v1(62.152,25.981) 62.152,25.848 FS1.3@63.55,24.451
  Bottom Layer w0.735: v1@58.243,39.081 58.396,38.929
  Bottom Layer w0.76: J23.1 50.179,32.976 51.167,31.988 56.831,31.988 61.897,26.922 61.897,26.871 62.076,26.692 v1(62.127,26.692) 62.152,26.667 62.152,26.311
  Bottom Layer w1: J23.1 J23.2 50.179,45.444
  Bottom Layer w1.091: 50.179,45.444 51.182,46.447
  Bottom Layer w1.116: 51.182,46.447 59.056,46.447 CON1.1@59.869,45.634
  other v1: 58.926,39.265 58.243,39.284
VM: C14.2 C25.1 C101.2 D2.2 D3.2 J29.1 R15.1 U7.12 | length 52.8
  Top Layer w0.254: v1(62.685,31.01) 62.706,30.99 63.366,30.99 63.816,30.541 63.867,30.541 64.159,30.248 R15.1
  Top Layer w0.5: v1@56.766,34.427 U7.12@57.485,34.427
  Top Layer w0.557: D3.2@61.977,37.913 63.78,37.913 C14.2
  Top Layer w0.608: v1(53.516,37.564) 53.668,37.715 54.61,37.715 54.751,37.856 C101.2 ; v1(56.335,33.652) 56.335,34.211 v1(56.564,34.439)
  Bottom Layer w0.608: v1(53.516,37.564) 54.024,37.056 56.462,37.056 ; v1(56.564,34.439) 56.549,34.439 56.444,34.545 56.444,37.037 56.462,37.056 ; v1@62.66,38.42 62.66,37.056 ; v1@62.661,38.421 v1(62.739,38.421) ; v1@62.7,38.46 62.891,38.652 v1@62.891,38.84 ; J29.1 64.517,21.146 63.498,22.164 63.498,29.207 62.66,30.045 62.66,37.056 ; 56.462,37.056 62.66,37.056
  other v1: 62.739,39.081
pads on no net: CON2.4 J8.1 J8.2 J15.1 J15.2 M1.17 M1.18 M1.19 M1.20 M1.21 M1.22 M1.32 U6.7 U6.8 U6.9 U6.10 U6.11 U6.12 U6.15 U7.8 U7.14
copper on no net:
  other v2: 4.596,107.642

## Polygon pours and split planes (outlines as drawn)
GND on Bottom Layer "GND-No Net" (solid, remove dead copper, pour order 18): 1.068,45.329 cw(c4.217,45.329) 4.217,48.479 70.105,48.479 cw(c70.105,45.253) 73.331,45.253 73.331,4.054 cw(c70.232,4.054) 70.232,0.956 4.471,0.956 cw(c4.471,4.359) 1.068,4.359
GND on Top Layer "Top Layer-No Net" (solid, pour order 20): 1.043,4.671 1.043,44.803 cw(c4.915,44.588) 5.129,48.46 69.112,48.46 cw(c69.251,44.561) 73.15,44.701 73.15,4.823 cw(c69.328,4.861) 69.289,1.038 5.231,1.038 cw(c4.953,4.948)

## Keep-outs
Keep-Out Layer:
  the board outline again, w0.102

## Other copper
Top Layer:
  region net VIN: 62.79,25.365 62.79,26.572 61.52,26.572 61.52,25.365
  region net VIN: 62.787,25.867 62.787,27.073 61.517,27.073 61.517,25.867
  region net VIN: 66.32,22.165 66.32,23.371 65.05,23.371 65.05,22.165
  region net +5v: 35.269,26.669 34.431,27.482 33.758,26.787 34.596,25.975
  region net +5v: 34.548,29.234 35.437,30.047 34.748,30.801 33.859,29.988
  region net +5v: 34.85,26.838 34.85,30.013 33.859,30.013 33.859,26.838
  region net +5v: 35.637,26.102 35.637,30.585 34.456,30.585 34.456,26.102
  region net VIN: 59.97,38.04 59.97,39.691 59.335,39.691 59.335,38.04
  region net VIN: 59.894,38.827 59.894,39.716 57.659,39.716 57.659,38.827
  region net VM: 62.968,38.014 62.968,39.64 61.647,39.64 61.647,38.014
  region net VIN: 64.581,23.879 65.457,23.003 65.825,23.371 64.949,24.247
  region net VIN: 67.159,22.952 67.159,23.257 66.244,23.257 66.244,22.952
  region net VIN: 64.949,23.663 64.949,24.4 64.161,24.4 64.161,23.663
  region net NewNet100: 63.628,20.818 63.628,22.139 62.028,22.139 62.028,20.818
  region net 3.3V: 39.981,18.202 39.981,19.345 39.066,19.345 39.066,18.202
  region net 3.3V: 44.807,18.99 44.807,20.793 35.688,20.793 35.688,18.99
  region net 3.3V: 38.203,23.816 38.203,25.39 36.298,25.39 36.298,23.816
  region net NewNet105: 7.977,8.169 7.977,9.236 7.062,9.236 7.062,8.169
  rectangle net GND: 14.352,22.012 20.067,27.473
  pour cut-out: 1.017,12.106 7.367,12.106 7.367,37.887 1.017,37.887
Bottom Layer:
  region net VM: 57.104,34.849 55.783,34.849 55.783,33.248 57.104,33.248
  region net VM: 64.06,38.116 64.06,39.564 61.723,39.564 61.723,38.116
  region net VIN: 62.787,25.676 62.787,27.251 61.517,27.251 61.517,25.676
  region net VIN: 60.656,44.491 60.656,46.498 58.015,46.498 58.015,44.491
  region net VIN: 58.472,40.097 58.472,46.218 57.1,46.218 57.1,40.097
  region net VIN: 59.005,38.014 59.005,40.199 57.1,40.199 57.1,38.014
  region net +5v: 62.383,23.358 62.383,24.933 60.809,24.933 60.809,23.358
  region net +5v: 35.663,27.067 35.663,29.2 33.758,29.2 33.758,27.067
  pour cut-out: 1.017,12.106 7.367,12.106 7.367,37.887 1.017,37.887

## Silkscreen, mask and mechanical layers (free items; w line width, h text height)
Top Overlay:
  lines w0.1: 6.275,39.919 6.275,41.037 8.104,41.037 8.104,39.919 6.326,39.919 ; 9.145,45.71 9.145,46.803 41.962,46.803 41.962,45.685 9.145,45.685 9.145,45.761 ; 10.288,1.362 10.288,2.454 25.376,2.454 25.376,1.362 10.313,1.362 ; 40.768,31.893 42.267,31.893 42.267,36.897 40.717,36.897 40.717,31.893 40.844,31.893 ; 41.835,23.079 41.835,25.009 43.714,25.009 43.714,23.079 41.86,23.079 ; 46.915,4.105 49.302,4.105 49.302,11.547 46.94,11.547 46.94,4.105 ; 49.328,45.71 49.328,48.174 50.903,48.174 50.903,45.71 49.353,45.71 ; 50.166,1.311 50.166,2.403 55.17,2.403 55.17,2.734 50.191,2.734 50.191,3.8 60.174,3.8 60.174,1.311 50.191,1.311 ; 51.741,45.71 51.741,48.174 53.316,48.174 53.316,45.71 51.792,45.71 51.792,45.812 ; 52.681,31.893 52.681,36.922 54.763,36.922 54.763,31.893 52.706,31.893 ; 55.195,45.71 55.195,48.2 56.719,48.2 56.719,45.71 55.221,45.71 ; 61.723,2.175 61.723,3.369 62.891,3.369 62.891,2.175 61.774,2.175 ; 64.06,45.253 64.06,47.793 65.635,47.793 65.635,45.253 64.111,45.253 ; 66.498,28.311 66.498,30.293 68.479,30.293 68.479,28.311 66.524,28.311 ; 70.029,12.894 70.029,14.519 72.569,14.519 72.569,12.894 70.054,12.894 ; 70.029,34.839 70.029,36.49 72.594,36.49 72.594,34.839 70.054,34.839 ; 70.054,37.354 70.054,39.03 72.62,39.03 72.62,37.354 70.08,37.354 ; 70.181,9.795 70.181,11.446 72.569,11.446 72.569,9.795 70.207,9.795 ; 9.145,47.107 41.962,47.107 41.962,48.25 9.145,48.25 9.145,47.107 ; 10.313,2.759 25.401,2.759 25.401,3.851 10.313,3.851 10.313,2.759 ; 25.68,4.08 28.093,4.08 28.093,11.573 25.68,11.573 25.68,4.08 ; 28.474,4.105 30.837,4.105 30.837,11.573 28.474,11.573 28.474,4.105 ; 31.599,1.362 46.661,1.362 46.661,3.826 31.599,3.826 31.599,2.734 41.657,2.734 41.657,2.454 31.599,2.454 31.599,1.362 ; 41.784,26.94 43.638,26.94 43.638,28.794 41.784,28.794 41.784,26.94 ; 42.292,37.989 44.705,37.989 44.705,45.482 42.292,45.482 42.292,37.989 ; 45.086,38.014 47.448,38.014 47.448,45.456 45.086,45.456 45.086,38.014 ; 60.529,4.156 62.866,4.156 62.866,11.624 60.529,11.624 60.529,4.156 ; 63.222,7.61 64.365,7.61 64.365,8.855 63.222,8.855 63.222,7.61 ; 63.984,41.164 65.584,41.164 65.584,43.678 63.984,43.678 63.984,41.164 ; 66.422,19.091 68.251,19.091 68.251,21.047 66.422,21.047 66.422,19.091
  text "DA1" at 16.079,48.073 h0.66 r180
  text "Tx2" at 18.594,48.073 h0.66 r180
  text "To7" at 11.05,48.047 h0.66 r180
  text "DA2" at 13.666,48.047 h0.66 r180
  text "To3" at 23.725,48.047 h0.66 r180
  text "To6" at 26.265,48.047 h0.66 r180
  text "To4" at 28.855,48.047 h0.66 r180
  text "To2" at 36.425,48.047 h0.66 r180
  text "Rx2" at 21.286,48.022 h0.66 r180
  text "To0" at 33.859,48.022 h0.66 r180
  text "Rx0" at 39.015,48.022 h0.66 r180
  text "To5" at 31.37,47.996 h0.66 r180
  text "Tx0" at 41.505,47.996 h0.66 r180
  text "GND" at 52.173,47.971 h0.71 r270
  text "Pow" at 55.678,47.971 h0.71 r270
  text "5V" at 49.734,47.59 h0.71 r270
  text "5V" at 64.466,47.209 h0.71 r270
  text "17" at 18.365,46.625 h0.66 r180
  text "15" at 23.42,46.625 h0.66 r180
  text "14" at 25.96,46.625 h0.66 r180
  text "13" at 28.5,46.625 h0.66 r180
  text "4" at 33.377,46.625 h0.66 r180
  text "27" at 10.847,46.599 h0.66 r180
  text "16" at 20.905,46.599 h0.66 r180
  text "2" at 35.917,46.599 h0.66 r180
  text "3" at 38.457,46.599 h0.66 r180
  text "1" at 40.844,46.599 h0.66 r180
  text "26" at 13.311,46.574 h0.66 r180
  text "25" at 15.876,46.574 h0.66 r180
  text "12" at 31.04,46.574 h0.66 r180
  text "IO" at 44.197,44.694 h0.84 r180
  text "GPIO" at 45.772,43.475 h0.99 r270
  text "GND" at 64.441,43.348 h0.71 r270
  text "3.3V" at 44.553,42.129 h0.74 r180
  text "12" at 7.621,40.935 h0.79 r180
  text "GND" at 44.451,39.589 h0.74 r180
  text "M1A" at 72.264,38.573 h0.74 r180
  text "2" at 41.733,36.668 h0.66 r180
  text "M11" at 54.484,36.668 h0.66 r180
  text "M1B" at 72.213,36.058 h0.74 r180
  text "4" at 41.733,35.474 h0.66 r180
  text "M12" at 54.535,35.373 h0.66 r180
  text "13" at 41.962,34.103 h0.66 r180
  text "M21" at 54.484,34.103 h0.66 r180
  text "27" at 42.038,32.858 h0.66 r180
  text "M22" at 54.586,32.782 h0.66 r180
  text "IO0" at 68.352,29.683 h0.66 r180
  text "Rx" at 43.308,28.21 h0.66 r180
  text "Tx" at 43.333,24.324 h0.66 r180
  text "EN" at 67.895,20.437 h0.66 r180
  text "M2A" at 72.289,14.037 h0.66 r180
  text "M2B" at 72.239,10.989 h0.66 r180
  text "GND" at 27.941,10.735 h0.79 r180
  text "GPIO" at 29.033,9.82 h1.22 r270
  text "IIC" at 60.986,9.338 h1.42 r270
  text "SPI" at 47.474,9.185 h1.42 r270
  text "3.3V" at 27.941,8.22 h0.79 r180
  text "+" at 63.603,7.915 h0.64
  text "ADC" at 27.992,5.655 h0.79 r180
  text "3.3V" at 56.11,3.699 h0.64 r270
  text "A0" at 14.606,3.648 h0.69 r180
  text "A6" at 19.661,3.648 h0.69 r180
  text "3.3V" at 42.495,3.648 h0.71 r270
  text "A3" at 12.066,3.623 h0.69 r180
  text "A7" at 17.146,3.623 h0.69 r180
  text "A5" at 22.201,3.623 h0.69 r180
  text "A4" at 24.69,3.623 h0.69 r180
  text "CS" at 33.326,3.623 h0.64 r180
  text "SCL" at 52.122,3.623 h0.64 r180
  text "SDA" at 54.84,3.623 h0.64 r180
  text "SCK" at 36.171,3.597 h0.64 r180
  text "MOSIMISO" at 41.454,3.597 h0.64 r180
  text "GND" at 45.086,3.597 h0.71 r270
  text "GND" at 58.675,3.369 h0.64 r270
  text "-" at 62.104,2.429 h0.64
  text "5" at 32.996,2.302 h0.71 r180
  text "23" at 40.895,2.276 h0.71 r180
  text "36" at 14.53,2.251 h0.69 r180
  text "35" at 17.044,2.251 h0.69 r180
  text "32" at 24.715,2.251 h0.69 r180
  text "18" at 35.739,2.251 h0.71 r180
  text "19" at 38.253,2.251 h0.71 r180
  text "39" at 12.015,2.226 h0.69 r180
  text "34" at 19.61,2.226 h0.69 r180
  text "33" at 22.15,2.226 h0.69 r180
  text "22" at 51.919,2.2 h0.64 r180
  text "21" at 54.281,2.175 h0.64 r180

## Text inside footprints (layer, text, board x,y; h text height)
K1: Top Overlay "NO" at 49.391,34.827 h0.71 r90; Top Overlay "NO" at 49.341,32.49 h0.71 r90